# Altium PCB RIAA_Correctiefilter2.PcbDoc
Units mm, origin at the board's own origin, x right, y up, seen from the top; angles counter-clockwise.
Board outline 58 x 52 mm, 2 copper layers (Top Layer, Bottom Layer); 44 components, 28 nets, 109 pads, 18 vias.
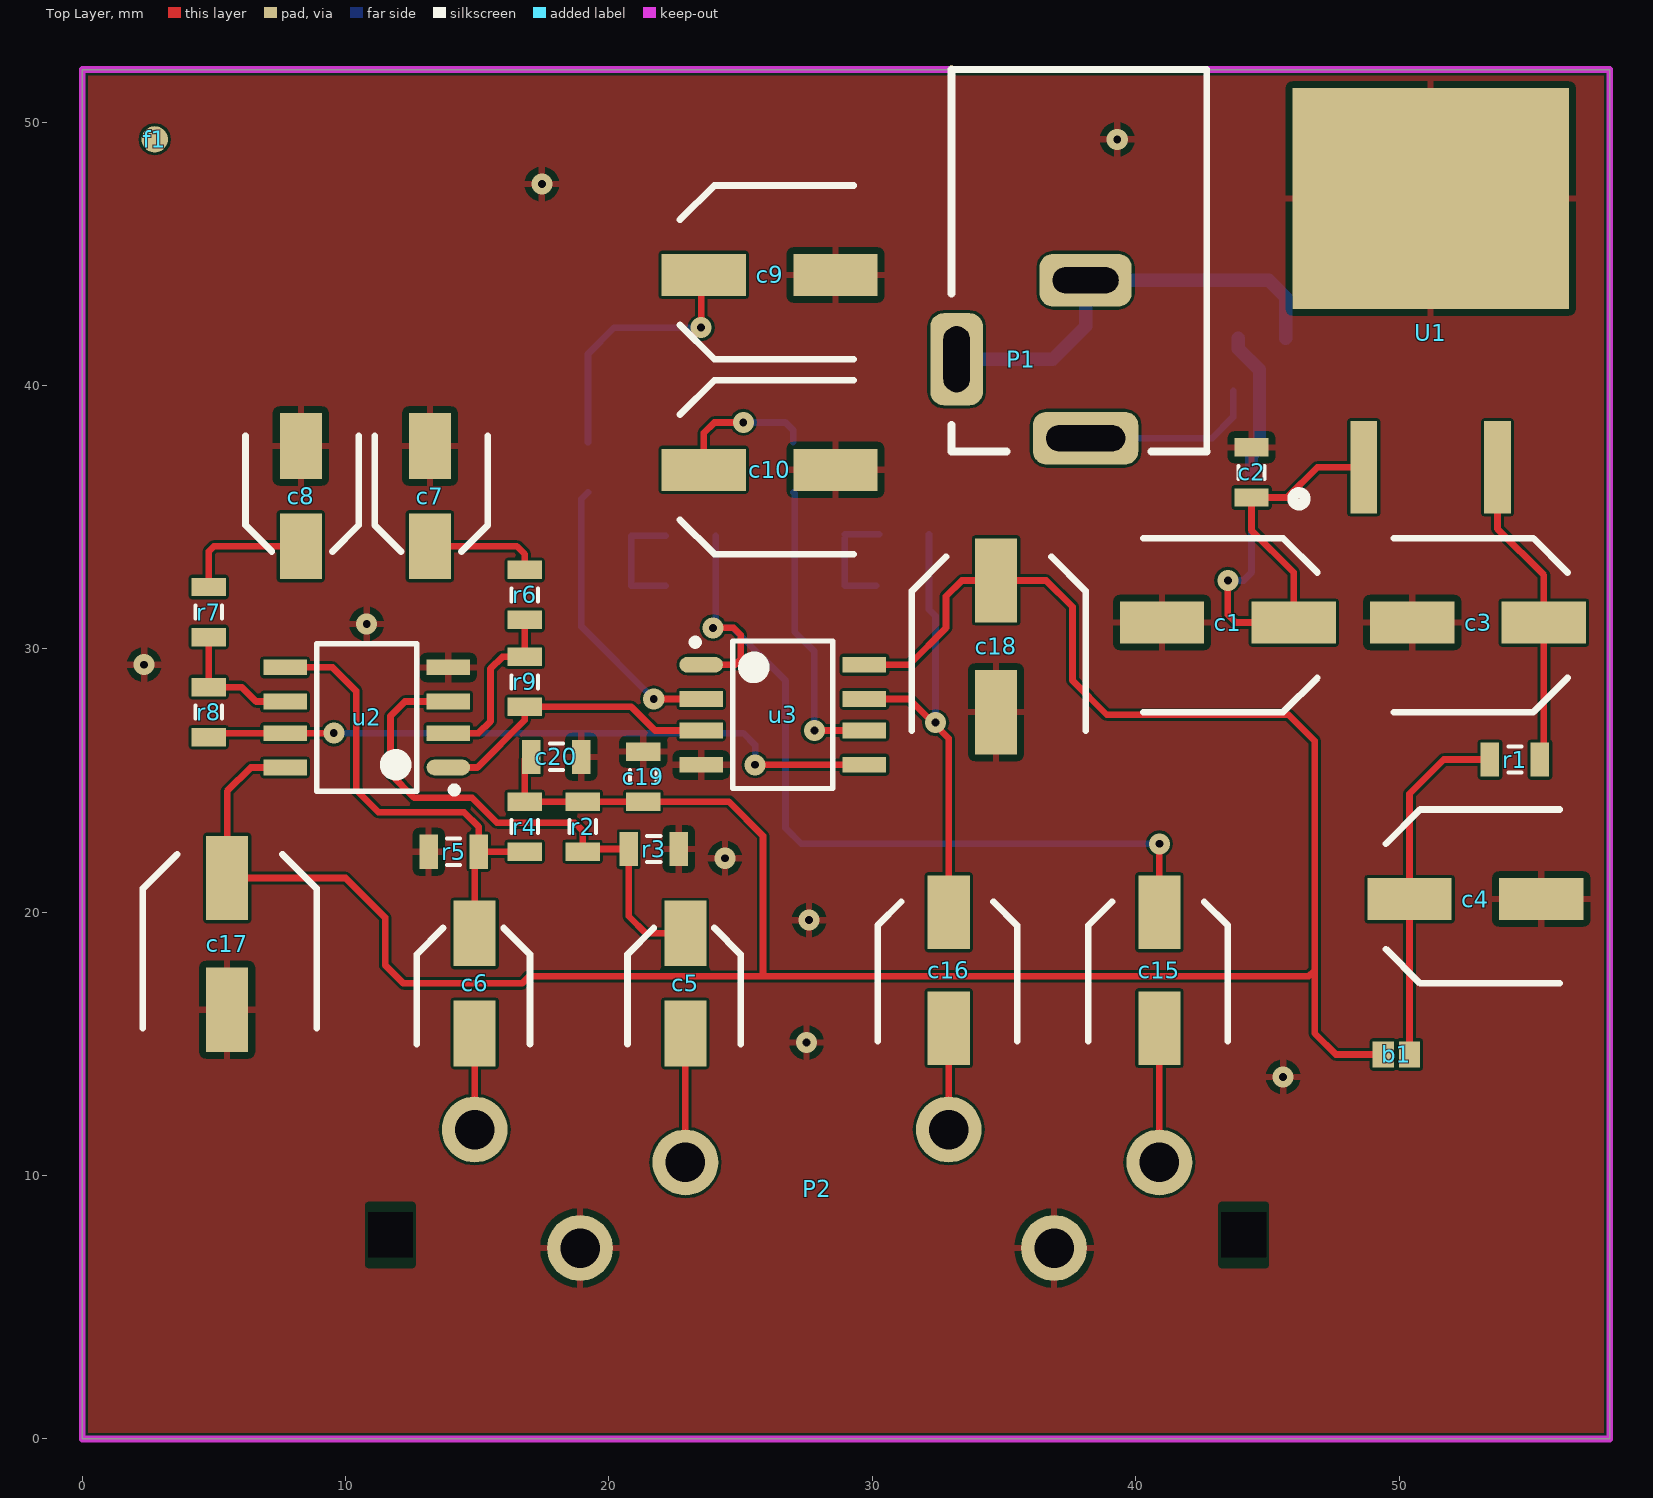
[diagram p0: Top Layer view]
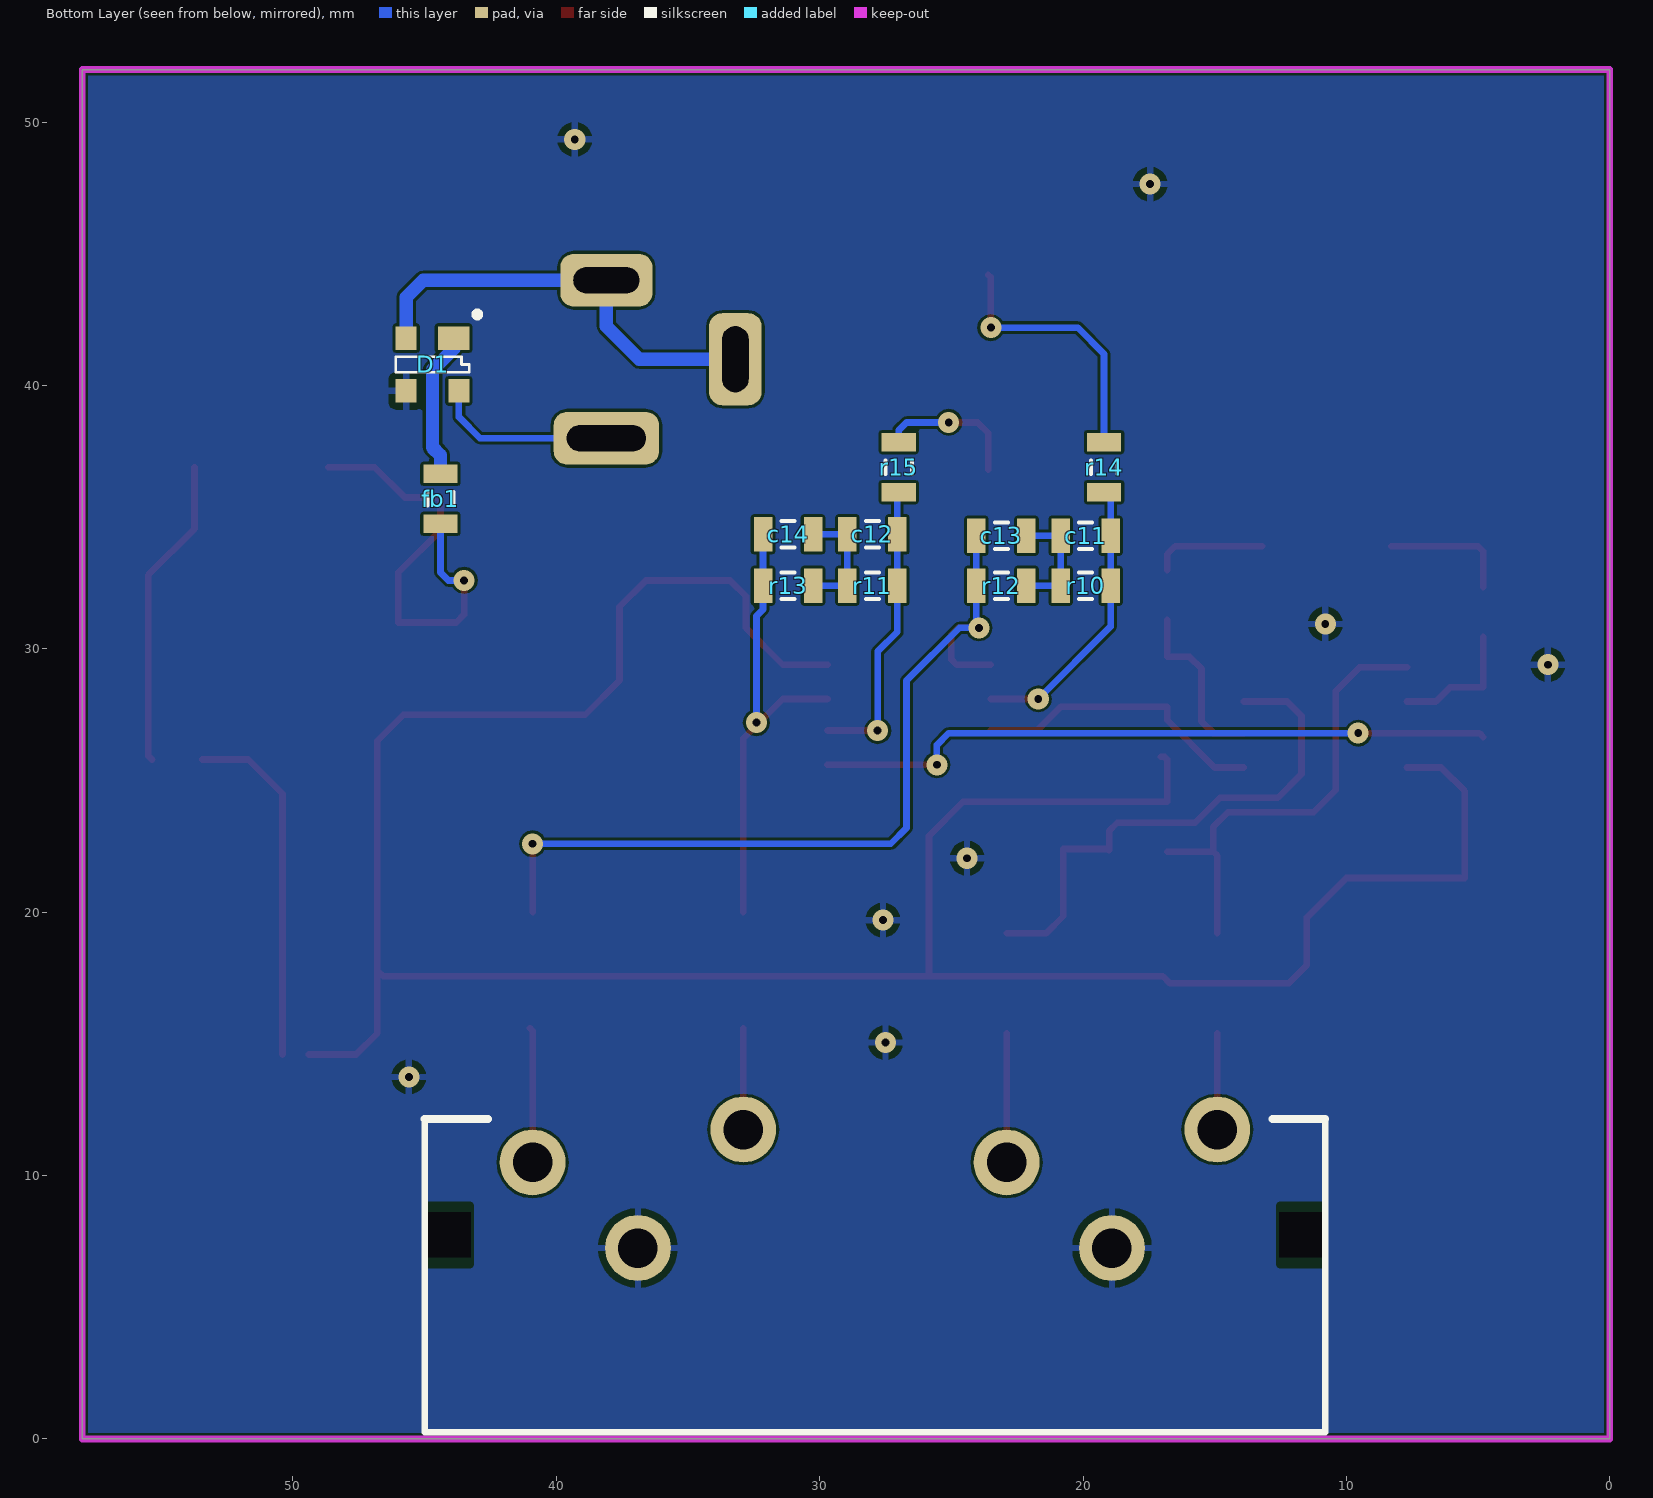
[diagram p1: Bottom Layer view, seen from below]
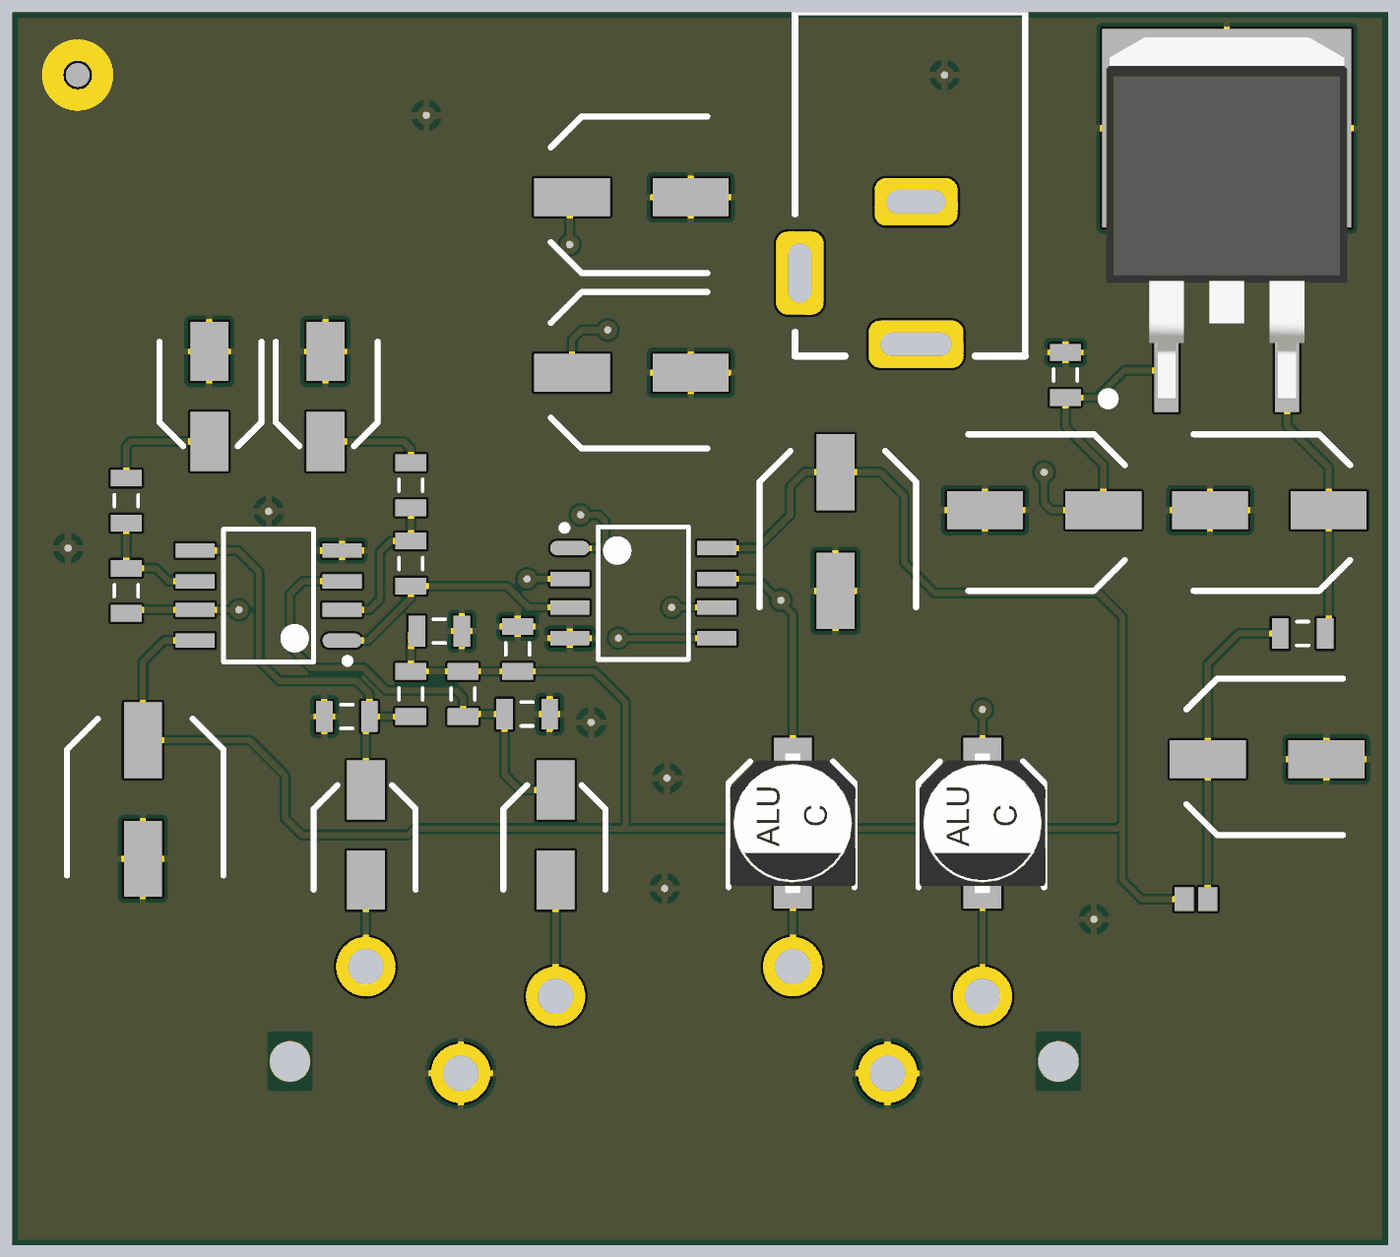
[diagram p2: 3D render of the assembled board from above, using the file's embedded part models]
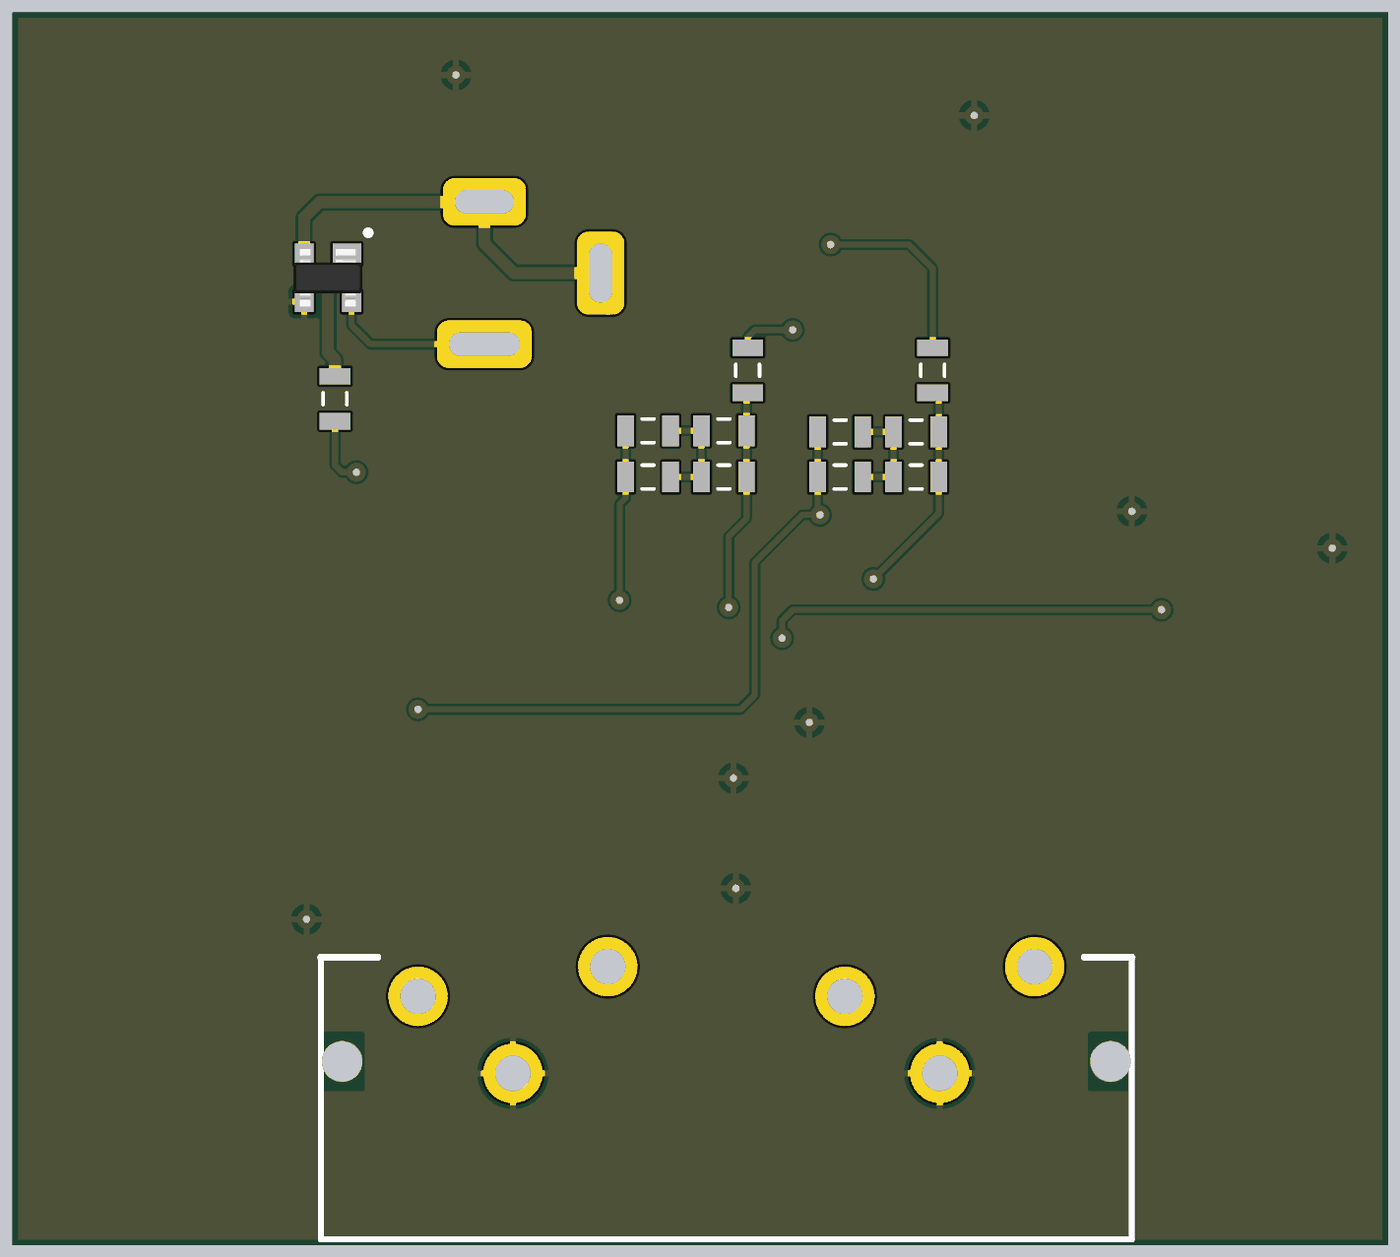
[diagram p3: 3D render of the assembled board from below, using the file's embedded part models]

## Layer stack, top to bottom
Top Solder: solder mask 0.0102, Solder Resist, Dk 3.5
Top Layer: signal copper 0.0356
Dielectric 1: dielectric 0.32, FR-4, Dk 4.8
Bottom Layer: signal copper 0.0356
Bottom Solder: solder mask 0.0102, Solder Resist, Dk 3.5

## Board outline
0,0 0,52 58,52 58,0

## Design rules (kind name [scope] priority, off if disabled: settings)
Clearance [All] p1: gap=0.102 ignorepadtopadclearanceinfootprint=FALSE except(0: Arc-Hole Track-Hole SMDPad-Hole THPad-Hole Via-Hole Fill-Hole Poly-Hole Region-Hole Text-Hole; 0.254: Fill-Fill Fill-Poly Fill-Region Fill-Text Poly-Poly Poly-Region Poly-Text Region-Region Region-Text Text-Text)
Height [All] p1: minheight=0 maxheight=80 prefheight=30
HoleSize [All] p1: absolutevalues=TRUE maxlimit=6.3 minlimit=0.3 maxpercent=80.000 minpercent=20.000
MinimumAnnularRing [All] p1: minimumring=0.15
MinimumSolderMaskSliver [All] p1: minsoldermaskwidth=0.32
PolygonConnect [All] p1: connectstyle=Relief reliefconductorwidth=0.254 reliefentries=4 polygonreliefangle="90 Angle" airgapwidth=0.254
RoutingVias [All] p1: holewidth=0.711 width=1.27 viastyle="Through Hole" minholewidth=0.711 minwidth=1.27 maxholewidth=0.711 maxwidth=1.27
SilkToSolderMaskClearance [IsPad] p1: minsilkscreentomaskgap=0.152 clearancetoexposedcopper=TRUE
SolderMaskExpansion [All] p1: expansion=0.102
Width [All] p1: maxlimit=2.54 minlimit=0.102 preferedwidth=0.254
26 further rules are at their usual default settings.

## Classes and differential pairs
component class Preamp&Filter: c5 c6 c7 c9 c10 c11 c12 c13 c14 c15 c16 c17 c18 c19 c20 P2 r2 r3 r4 r5 r6 r7 r8 r9 r10 r11 r12 r13 r14 r15 u2 u3 ""
component class PowerSupply: b1 c1 c2 c3 c4 D1 f1 fb1 P1 r1 U1

## Components (designator, comment, footprint, x,y, rotation, side; value= is the part's Value field where it differs from the comment)
b1 "Solder Bridge" "SOLDER BRIDGE" 49.9,14.6 r180 top
c1 "100µF" ELCO-D 43.5,31 r0 top
c2 "100nF" 0805 44.4,36.7 r270 top
c3 "22µF" Elco-D 53,31 r0 top
c4 "47µF" ELCO-D 52.9,20.5 r180 top
c5 "*" ELCO-B 22.9,17.3 r90 top
c6 "*" ELCO-B 14.9,17.3 r90 top
c7 "2.2µF" ELCO-B 13.2,35.8 r270 top
c8 "2.2µF" ELCO-B 8.3,35.8 r270 top
c9 "22µF" ELCO-D 26.1,44.2 r180 top
c10 "22µF" ELCO-D 26.1,36.8 r180 top
c11 "6.8nF" 0805 19.9,34.3 r0 bottom
c12 "6.8nF" 0805 28,34.35 r0 bottom
c13 "1.5nF" 0805 23.1,34.3 r0 bottom
c14 "1.5nF" 0805 31.2,34.35 r0 bottom
c15 "10µF" ELCO-C 40.9,17.8 r90 top
c16 "10µF" ELCO-C 32.9,17.8 r90 top
c17 "100µF" ELCO-D 5.5,18.8 r90 top
c18 "100µF" ELCO-D 34.7,30.1 r90 top
c19 "100nF" 0805 21.3,25.15 r270 top
c20 "100nF" 0805 18,25.9 r180 top
D1 "Bridge Rectifier" SOT-143 44.7,40.8 r0 bottom
f1 "Fiducial" FIDUCIAL 2.75,49.35 r0 top
fb1 "*" 0805 44.4,35.7 r270 bottom
P1 "Power Jack" "POWER JACK" 38.1,41 r270 top
P2 "*" "RCA 4-WAY" 38.1,9.65 r180 top
r1 "10R" 0805 54.4,25.8 r180 top
r2 "91k" 0805 19,23.25 r270 top
r3 "100k" 0805 21.7,22.4 r0 top
r4 "91k" 0805 16.8,23.25 r270 top
r5 "100k" 0805 14.1,22.3 r180 top
r6 "10k" 0805 16.8,32.05 r90 top
r7 "10k" 0805 4.8,31.4 r90 top
r8 "120k" 0805 4.8,27.6 r270 top
r9 "120k" 0805 16.8,28.75 r270 top
r10 "750k" 0805 19.9,32.4 r0 bottom
r11 "750k" 0805 28,32.4 r0 bottom
r12 "51k" 0805 23.1,32.4 r0 bottom
r13 "51k" 0805 31.2,32.4 r0 bottom
r14 "1k" 0805 19.2,36.9 r270 bottom
r15 "1k" 0805 27,36.9 r270 bottom
U1 "NCV8674" "D²PAK 3" 51.2,42 r0 top
u2 "*" R-PDSO-G8-P127D620X530 10.5,27.4 r180 top
u3 "*" R-PDSO-G8-P127D620X530 26.9,27.5 r0 top

## Footprints (in the part's own frame and the unit in brackets; to place one, negate y for a bottom-side part, rotate by r counter-clockwise, add the part's x,y. Pads: shape width x height; smd on the part's side, far side on the other; paste and mask are expansions set on the pad)
0805 [mm] "Generic Package"
  rect 0.7x1.3 smd: 1(-0.95,0) 2(0.95,0)
  silkscreen extent -0.25,-0.5 0.25,0.5, body extent -1,-0.63 1,0.63, height 0.43
"D²PAK 3" [mm]
  rect 1.016x3.504 smd: 1(-2.54,-5.106) 3(2.54,-5.106)
  rect 10.49x8.38 smd: 4(0,5.106)
  silkscreen extent -5.32,-6.62 -4.68,-5.98, body extent -5.08,-6.32 5.08,8.95, height 4.88
ELCO-B [mm] "SMD Electrolytic Capacitor-Size B-Pitch 1mm-4.3mm x 5.4mm"
  rect 2.5x1.6 smd: 1(-1.9,0) 2(1.9,0)
  silkscreen extent -2.3,-2.1 2.1,2.2, body extent -2.55,-2.1 2.45,2.2, height 6.42
ELCO-C [mm] "SMD Electrolytic Capacitor-Size B-Pitch 1mm-5.3mm x 5.4mm"
  rect 2.8x1.6 smd: 1(-2.2,0) 2(2.2,0)
  silkscreen extent -2.7,-2.6 2.6,2.7, body extent -2.95,-2.65 2.95,2.65, height 5.41
ELCO-D [mm] "SMD Electrolytic Capacitor-Size D-Pitch 1.8mm-6.3mm x 5.4mm"
  rect 3.2x1.6 smd: 1(-2.5,0) 2(2.5,0)
  silkscreen extent -3.2,-3.4 3.4,3.2, body extent -3.15,-2.65 3.15,2.65, height 5.7
Elco-D [mm] "SMD Electrolytic Capacitor-Size D-Pitch 1.8mm-6.3mm x 5.4mm"
  rect 3.2x1.6 smd: 1(-2.5,0) 2(2.5,0)
  silkscreen extent -3.2,-3.4 3.4,3.2, body extent -3.15,-2.65 3.15,2.65, height 5.7
FIDUCIAL [mm]
  round 1 smd mask+1: 0(0,0)
"POWER JACK" [mm] "6mm Jack plug"
  rrect50% 2x4 hole 1 slot 3 at 90 deg: 1(3,0)
  rrect50% 2x3.5 hole 1 slot 2.5 at 90 deg: 2(-3,0)
  rrect50% 3.5x2 hole 1 slot 2.5 at 0 deg: 2(0,-4.9)
  silkscreen extent -11,-5.1 3.5,4.6, body extent -11.05,-5.15 3.45,4.65, height 11
R-PDSO-G8-P127D620X530 [mm] "TI SOIC8 package, 127 Pitch, 620x530 Dimensions"
  oval 1.65x0.6 smd: 1(-3.4,1.9)
  rect 1.65x0.6 smd: 2(-3.4,0.6) 3(-3.4,-0.6) 4(-3.4,-1.9) 5(2.8,-1.9) 6(2.8,-0.6) 7(2.8,0.6) 8(2.8,1.9)
  silkscreen extent -3.75,-2.8 1.6,2.88, body extent -3.43,-2.5 2.83,2.5, height 1.75
"RCA 4-WAY" [mm] "Vertical RCA connector with 4 connectors"
  round 2.5 hole 1.5: 1(19.2,2.4) 2(15.2,-0.85) 3(23.2,-2.1) 4(1.2,2.4) 5(-2.8,-0.85) 6(5.2,-2.1)
  rect 0x0 hole 1.7 square: ""(-6,1.9) ""(26.4,1.9)
"SOLDER BRIDGE" [mm]
  rect 0.8x1 smd: 1(-0.5,0) 2(0.5,0)
SOT-143 [mm]
  rect 1.2x0.9 smd: 1(-0.8,-1)
  rect 0.8x0.9 smd: 2(1,-1) 3(1,1) 4(-1,1)
  silkscreen extent -1.8,-2 1.4,0.3, body extent -1.46,-1.21 1.46,1.21, height 1

## Part data
c1 c3 c4 c9 c10 c17 c18: library part "Elco D", "Elco size D 6.3x5.4"
c2 c19 c20: library part "0805 Capacitor", "...F"
c5 c6 c7 c8: library part "Elco B"
c11 c12 c13 c14: library part "0805 Capacitor", "0805 Capacitor Package"
c15 c16: library part "Elco C"
fb1: library part "Ferrite Bead 0805 Package", "Ferrite Bead"
P1: library part "DC Power Jack", "DC Power Jack"
P2: library part PSG01551, "4-way RCA connector"
r1 r2 r3 r4 r5 r6 r7 r8 r9 r10 r11 r12 r13: library part "0805 Resistor", "0805 Resistor package"
r14 r15: library part "0805 Resistor", "...R"
U1: "Very Low Iq Low Dropout Linear Regualtor"
u2: library part NE5532x, "Dual Low-Noise OpAmp"
u3: library part TL027x, "Low-Noise JFET-input OpAmp"

## Via types
v1: diameter 0.8, hole 0.3, Top Layer to Bottom Layer, tented both sides, 18 vias

## Nets (pads, with @x,y where several pads share a name; then routed paths per layer and width w, separated by ;. In a path a pad name is that pad's centre, name@x,y a point inside that pad or via, vN(x,y) a via of type N, cw(c..) or ccw(c..) an arc to the next point about the centre after c; other vN are vias at no path point)
GND: c1.1 c2.1 c3.1 c4.1 c7.1 c8.1 c9.1 c10.1 c17.1 c18.1 c19.1 c20.1 D1.3 P2.1 P2.4 r3.2 r5.2 U1.4 u2.4 u3.4
  other v1: 45.6,13.75 27.5,15.05 27.6,19.7 24.4,22.05 2.35,29.4 10.8,30.95 17.45,47.65 39.3,49.35
Netb1_1: b1.1 c4.2 r1.2 | length 13.5
  Top Layer w0.254: b1.1 c4.2 50.4,24.5 51.7,25.8 r1.2
Netc1_2: c1.2 c2.2 fb1.2 U1.1 | length 16.9
  Top Layer w0.254: v1(43.5,32.6) 43.5,31.3 43.8,31 c1.2 46,32.9 44.4,34.5 c2.2 45.75,35.75 46.894,36.893 U1.1
  Bottom Layer w0.254: v1(43.5,32.6) 44.1,32.6 44.4,32.9 fb1.2
Netc3_2: c3.2 r1.1 U1.3 | length 11.9
  Top Layer w0.254: U1.3 53.74,34.56 55.5,32.8 c3.2 55.5,25.95 r1.1
Netc5_1: c5.1 P2.2 | length 4.9
  Top Layer w0.254: P2.2 c5.1
Netc5_2: c5.2 r2.2 r3.1 u2.3 | length 20.3
  Top Layer w0.254: u2.3 12.25,28 11.7,27.45 11.7,25.25 12.6,24.35 14.8,24.35 15.75,23.4 18.7,23.4 19,23.1 19,22.35 19.05,22.4 r3.1 20.75,19.85 21.4,19.2 c5.2
Netc6_1: c6.1 P2.3 | length 3.7
  Top Layer w0.254: P2.3 c6.1
Netc6_2: c6.2 r4.2 r5.1 u2.5 | length 17.9
  Top Layer w0.254: u2.5 9.5,29.3 10.4,28.4 10.4,24.65 11.25,23.8 14.5,23.8 15.05,23.25 r5.1 ; c6.2 14.9,22.15 r5.1 ; r4.2 r5.1
Netc7_2: c7.2 r6.2 | length 4.3
  Top Layer w0.254: c7.2 16.5,33.9 16.8,33.6 r6.2
Netc8_2: c8.2 r7.2 | length 4.9
  Top Layer w0.254: r7.2 4.8,33.7 5,33.9 c8.2
Netc9_2: c9.2 r14.1 | length 10.1
  Top Layer w0.254: v1(23.5,42.2) 23.5,44.1 c9.2
  Bottom Layer w0.254: r14.1 19.2,41.2 20.2,42.2 v1(23.5,42.2)
Netc10_2: c10.2 r15.1 | length 5.5
  Top Layer w0.254: c10.2 23.6,38.2 24,38.6 v1(25.1,38.6)
  Bottom Layer w0.254: v1(25.1,38.6) 26.7,38.6 27,38.3 r15.1
Netc11_1: c11.1 r10.1 r14.2 u3.2 | length 10.9
  Top Layer w0.254: v1(21.7,28.1) u3.2
  Bottom Layer w0.254: r14.2 18.95,35.7 c11.1 r10.1 18.95,30.85 v1(21.7,28.1)
Netc11_2: c11.2 c13.1 r10.2 r12.1 | length 4.5
  Bottom Layer w0.254: r12.1 r10.2 c11.2 c13.1
Netc12_1: c12.1 r11.1 r15.2 u3.6 | length 11.3
  Top Layer w0.254: v1(27.8,26.9) u3.6
  Bottom Layer w0.254: r15.2 27.05,35.9 c12.1 r11.1 27.05,30.65 27.8,29.9 v1(27.8,26.9)
Netc12_2: c12.2 c14.1 r11.2 r13.1 | length 4.3
  Bottom Layer w0.254: c12.2@28.95,34.2 r11.2 r13.1@30.15,32.4 ; c12.2 c14.1
Netc13_2: c13.2 c15.2 r12.2 u3.1 | length 33.4
  Top Layer w0.254: u3.1 24.8,29.4 25,29.6 25,30.537 24.737,30.8 v1(23.95,30.8) ; c15.2 v1(40.9,22.6)
  Bottom Layer w0.254: c13.2 r12.2 24.05,30.9 v1(23.95,30.8) 24.7,30.8 26.7,28.8 26.7,23.2 27.3,22.6 v1(40.9,22.6)
Netc14_2: c14.2 c16.2 r13.2 u3.7 | length 17.7
  Top Layer w0.254: u3.7 31.4,28.1 32.9,26.6 c16.2
  Bottom Layer w0.254: c14.2 r13.2 32.15,31.5 32.4,31.25 v1(32.4,27.2)
Netc15_1: c15.1 P2.5 | length 5.1
  Top Layer w0.254: P2.5 40.9,15.5 c15.1@41,15.6
Netc16_1: c16.1 P2.6 | length 3.9
  Top Layer w0.254: P2.6 c16.1
NetD1_1: D1.1 fb1.1 | length 5.6
  Bottom Layer w0.508: D1.1 43.9,41.4 44.7,40.6 44.7,37.65 44.4,37.35 fb1.1
NetD1_2: D1.2 P1.2 | length 16.6
  Bottom Layer w0.508: P1.2@33.2,41 36.85,41 38.1,42.25 38.1,44 45.05,44 45.7,43.35 D1.2
NetD1_4: D1.4 P1.1 | length 6.9
  Bottom Layer w0.254: P1.1 42.9,38 43.7,38.8 D1.4
Netr6_1: r6.1 r9.1 u2.2 | length 6.7
  Top Layer w0.254: u2.2 15.05,26.8 15.5,27.25 15.5,29.25 15.95,29.7 r9.1 r6.1
Netr7_1: r7.1 r8.1 u2.6 | length 5
  Top Layer w0.254: r7.1 r8.1 6.05,28.55 6.6,28 u2.6
Netr8_2: r8.2 u2.7 u3.5 | length 25.9
  Top Layer w0.254: r8.2 4.95,26.8 u2.7 v1(9.55,26.8) ; v1(25.55,25.6) u3.5
  Bottom Layer w0.254: v1(9.55,26.8) 25.1,26.8 25.55,26.35 v1(25.55,25.6)
Netr9_2: r9.2 u2.1 u3.3 | length 11.2
  Top Layer w0.254: u2.1 15,25.5 16.8,27.3 r9.2 20.85,27.8 21.75,26.9 u3.3
VCC: b1.2 c17.2 c18.2 c19.2 c20.2 r2.1 r4.1 u2.8 u3.8 | length 104.2
  Top Layer w0.254: u2.8 6.4,25.5 5.5,24.6 c17.2 10,21.3 11.5,19.8 11.5,18 12.2,17.3 16.7,17.3 16.969,17.569 25.85,17.569 ; c20.2 16.9,25.9 16.8,25.8 r4.1 c19.2 24.55,24.2 25.85,22.9 25.85,17.569 ; u3.8 31.4,29.4 32.8,30.8 32.8,32 33.4,32.6 c18.2 36.6,32.6 37.6,31.6 37.6,28.8 38.9,27.5 45.8,27.5 46.8,26.5 46.8,17.8 ; b1.2 47.6,14.6 46.8,15.4 46.8,17.8 ; 25.85,17.569 46.569,17.569 46.8,17.8
pads on no net: f1.0 P2.

## Polygon pours and split planes (outlines as drawn)
GND on Top Layer "t" (solid, pour order 0): 0,0 0,52 58,52 58,0
GND on Bottom Layer "Top Layer-No Net" (solid, pour order 2): 0,0 0,52 58,52 58,0

## Keep-outs
Keep-Out Layer:
  the board outline again, w0.254